# Altium PCB L50T-MAU.PcbDoc (part 2 of 2)
Units mil, origin at the board's own origin, x right, y up, seen from the top; angles counter-clockwise.
Board outline 6702.94 x 9262 mil, 2 copper layers (Top Layer, Bottom Layer); 116 components, 86 nets, 377 pads, 320 vias.
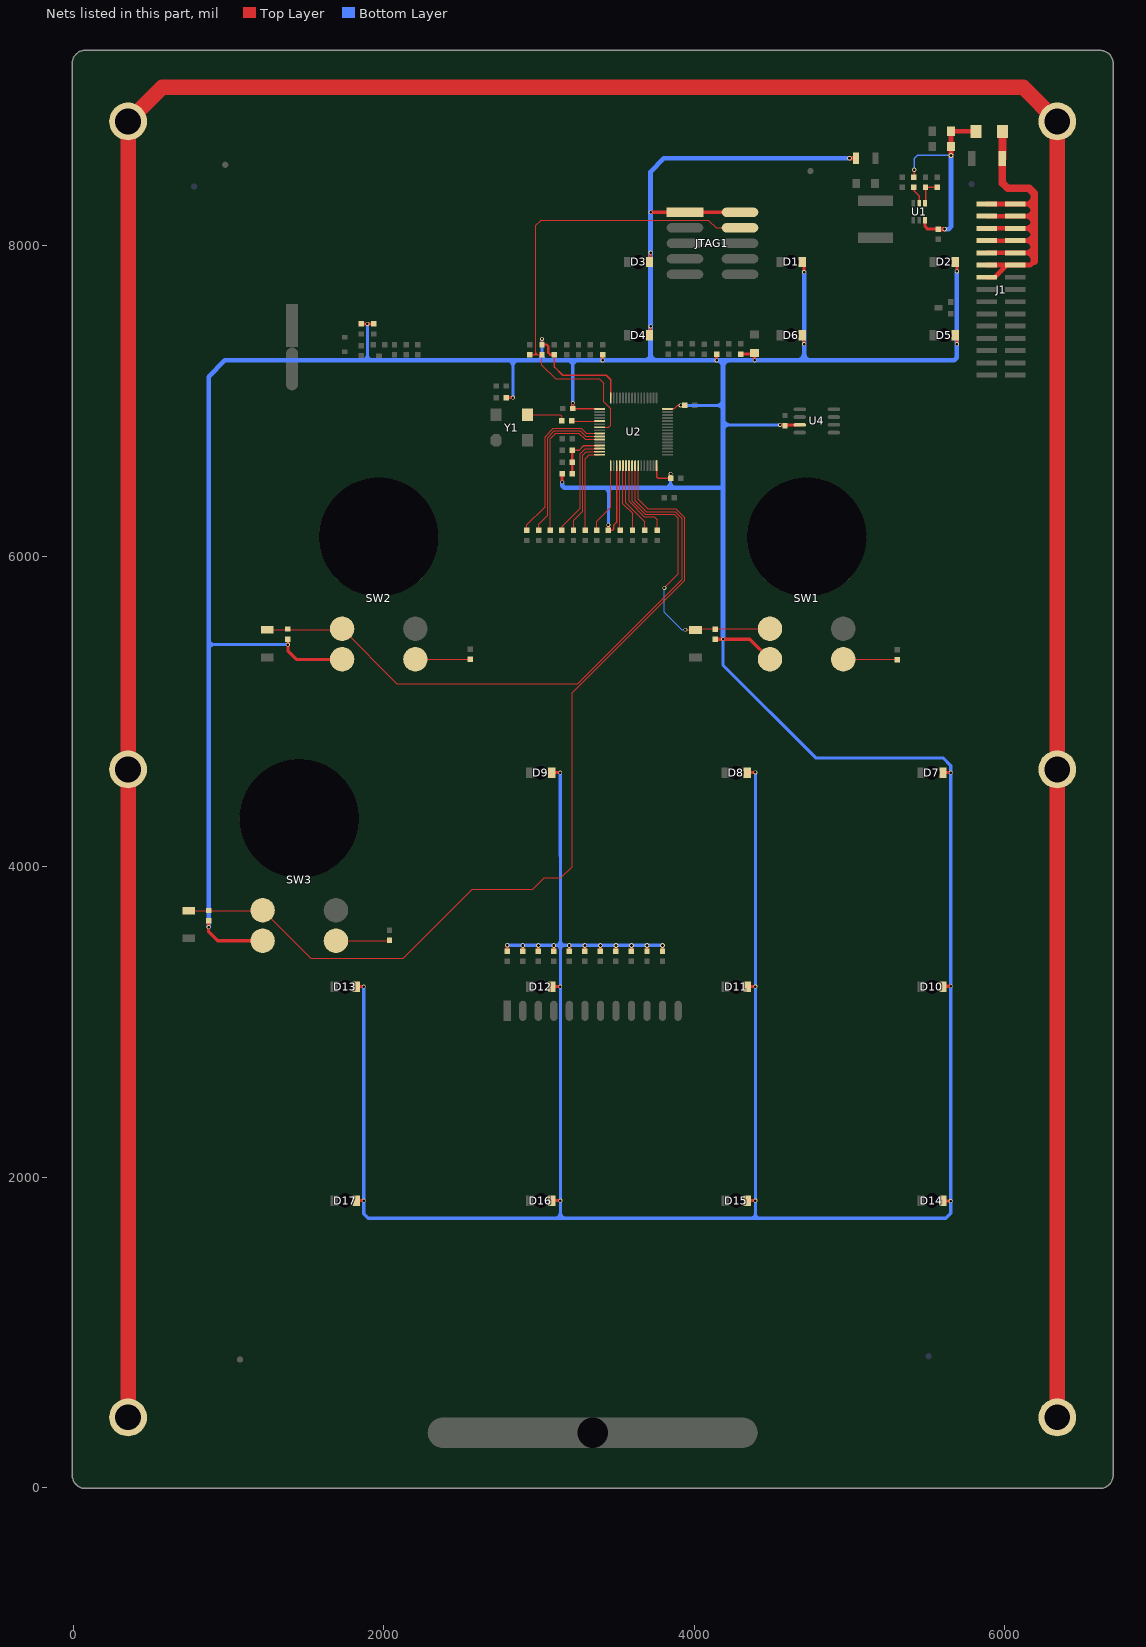
[diagram p2: the nets of this part, all layers, seen from the top]

## Via types
v1: diameter 25, hole 16, Top Layer to Bottom Layer, tented both sides, 293 vias
v2: diameter 30, hole 18, Top Layer to Bottom Layer, tented both sides, 24 vias
v3: diameter 40, hole 20, Top Layer to Bottom Layer, tented both sides, 2 vias
v4: diameter 28, hole 16, Top Layer to Bottom Layer, tented both sides, 1 vias

## Nets (pads, with @x,y where several pads share a name; then routed paths per layer and width w, separated by ;. In a path a pad name is that pad's centre, name@x,y a point inside that pad or via, vN(x,y) a via of type N, cw(c..) or ccw(c..) an arc to the next point about the centre after c; other vN are vias at no path point) (continued)
NetR4_1: R4.1 U1.5 | length 117
  Top Layer w10: R4.1@5415,8375 5415,8352.91 5449,8318.91 U1.5@5449,8272.12
NetR5_2: R5.2 R7.1 U1.4 | length 179.4
  Top Layer w10: U1.4@5486.4,8272.12 5490,8275.72 R5.2@5490,8375 R7.1@5565,8375
NetR20_2: R20.2 Y1.3 | length 257.2
  Top Layer w8: Y1.3@2925,6910.35 3137.56,6910.35 3147.91,6900 R20.2@3147.91,6870
NetR26_2: R26.2 SW1.4 | length 348.4
  Top Layer w8: SW1.4@4960.63,5334.65 5305.27,5334.65 R26.2@5307.91,5332
NetR27_2: R27.2 SW2.4 | length 354.7
  Top Layer w8: SW2.4@2204.72,5334.65 2557.56,5334.65 R27.2@2558.91,5336
NetR28_2: R28.2 SW3.4 | length 346.2
  Top Layer w8: SW3.4@1692.91,3522.05 2034.96,3522.05 R28.2@2037.91,3525
NRST: CU2.2 JTAG1.4 R16.1 U2.7 | length 3191.7
  Top Layer w8: CU2.2@2939.91,7297 2964.01,7297 ; 2996,7297 cw(c2995.96,7313.04) 2995.9,7297 ; U2.7@3391.5,6829.53 3450.53,6829.53 3462,6841 3462,6950 3418,6994 3418,7112 3389,7141 3109,7141 3019.91,7230.09 R16.1@3019.91,7297 2995.9,7297 ; JTAG1.4@4295.17,8114 4142,8114 4092,8164 3014,8164 2979.91,8129.91 2979.91,7312.99 2979.91,7312.9 ; 2964.01,7297 ccw(c2963.96,7312.96) 2979.91,7312.9 ; 2964.01,7297 2979.91,7297 ; 2979.91,7297 2979.91,7312.9 ; 2979.91,7297 2995.9,7297 ; 2979.91,7312.9 ccw(c2995.96,7313.04) 2995.9,7297 ; 2979.91,7312.9 cw(c2995.96,7313.04) 2979.91,7312.96 cw(c2963.96,7312.96) 2979.91,7312.9
OSC_IN: R20.1 U2.5 | length 179
  Top Layer w8: R20.1@3214.02,6868.9 U2.5@3391.5,6868.9
  Top Layer w10: R20.1@3212.91,6870 R20.1@3214.02,6868.9
PG: I1.1 I2.1 I3.1 I4.1 I5.1 I6.1 | length 22860.1
  Top Layer w100: I5.1@354.33,452.76 I3.1@354.33,4625.98 I1.1@354.33,8799.21 575.12,9020 6117.8,9020 I2.1@6338.58,8799.21 I4.1@6338.58,4625.98 I6.1@6338.58,452.76
SIGNAL1: R23.1 SW3.1 U2.26 Z3.1 | length 5954.5
  Top Layer w8: Z3.1@744.91,3716 1217.57,3716 SW3.1@1220.47,3718.9 1530.37,3409 2124.91,3409 2570.91,3855 2959.91,3855 3032.91,3928 3141.49,3928 3213.49,4000 3213.49,5118.2 3938.91,5843.63 3938.91,6246.37 3879.97,6305.32 3699.76,6305.32 3639.53,6365.55 U2.26@3639.53,6581.5
SIGNAL2: R22.1 SW2.1 U2.25 Z2.1 | length 4066
  Top Layer w8: Z2.1@1249.91,5525 1725.79,5525 SW2.1@1732.28,5531.5 2085.78,5178 3250.66,5178 3922.91,5850.25 3922.91,6239.75 3877.03,6285.63 3691.61,6285.63 3619.84,6357.39 U2.25@3619.84,6581.5
SIGNAL3: R21.1 SW1.1 U2.24 Z1.1 | length 1943.5
  Top Layer w8: U2.24@3600.16,6581.5 3601.94,6579.72 3601.94,6352.67 3684.98,6269.63 3870.4,6269.63 3897.91,6242.12 3897.91,5885 v1(3807.91,5795) ; v1(3942.91,5525) 4006.91,5525 Z1.1@4007.91,5524 4015.41,5531.5 SW1.1@4488.19,5531.5
  Bottom Layer w8: v1(3807.91,5795) 3807.91,5637.63 3920.54,5525 v1(3942.91,5525)
SPS12V: C1.2 C2.2 C3.1 D19.2 R4.2 U1.3 | length 1361.5
  Top Layer w10: R4.2@5415,8440 5416.91,8441.91 v2(5416.91,8488)
  Top Layer w20: U1.3@5486.4,8161.88 5486.4,8123.51 5504.41,8105.5 C3.1@5573,8105.5
  Top Layer w30: C3.1@5573,8105.5 v2(5612.91,8105.5) ; v2(5654,8580) C2.2@5654,8637 C1.2@5654,8735 D19.2@5815,8735
  Bottom Layer w10: v2(5416.91,8488) 5416.91,8561 5435.91,8580 v2(5654,8580)
  Bottom Layer w30: v2(5612.91,8105.5) 5638.41,8105.5 5654,8121.09 v2(5654,8580)
SPS_12V: D19.1 D20.2 J1.1 J1.2 J1.3 J1.4 J1.5 J1.6 J1.7 J1.8 J1.9 J1.10 J1.11 J1.12 J1.13 | length 3978.1
  Top Layer w30: J1.13@5884,7795.26 5935.26,7795.26 J1.12@6014,7874 ; J1.11@5884,7874 J1.12@6014,7874 ; J1.9@5884,7952.74 J1.10@6069,7952.74 6141,7952.74 ; J1.7@5884,8031.48 J1.8@6069,8031.48 6141,8031.48 ; J1.5@5884,8110.22 J1.6@6069,8110.22 6141,8110.22 ; J1.3@5884,8188.96 J1.4@6069,8188.96 6141,8188.96 ; J1.1@5884,8267.7 J1.2@6069,8267.7 6186.7,8267.7 ; D20.2@5984.85,8560 5984.85,8734.85 D19.1@5985,8735 ; 6140,8267.7 ccw(c6132.35,8317.35) 6182,8325 ; 6141,8189 ccw(c6137,8234) 6181.83,8228.45 ; 6142,8267.7 cw(c6131.15,8216.85) 6181.83,8228.45 ; 6182,7971 ccw(c6131.26,7980.74) 6182.04,7990.29 ; 6182,8050 ccw(c6131.39,8059.61) 6182.02,8069.12 ; 6182,8126 ccw(c6130.02,8136.98) 6181.65,8149.5 ; 6182,8170 cw(c6131.61,8160.61) 6181.65,8149.5 ; 6182,8206 ccw(c6131.15,8216.85) 6181.83,8228.45 ; 6182,8238 cw(c6137,8234) 6181.83,8228.45 ; 6183,8012 cw(c6132.37,8003.37) 6182.04,7990.29 ; 6183,8092 cw(c6131.74,8082.74) 6182.02,8069.12 ; 6183.48,8031.48 6141,8031.48 ; 6186.22,8110.22 6141,8110.22 ; 6190,7899 6183,7892 ; 6190,7954 6188.74,7952.74 6141,7952.74 ; 6190,8198 6180.96,8188.96 6141,8188.96 ; J1.12@6014,7874 J1.12@6069,7874 6165,7874 6183,7892 ; 6141,7952.74 ccw(c6132.37,8003.37) 6182.04,7990.29 ; 6141,7952.74 cw(c6131.63,7901.37) 6183,7892 ; 6141,8031.48 cw(c6131.26,7980.74) 6182.04,7990.29 ; 6141,8031.48 ccw(c6131.74,8082.74) 6182.02,8069.12 ; 6141,8110.22 cw(c6131.39,8059.61) 6182.02,8069.12 ; 6141,8110.22 ccw(c6131.61,8160.61) 6181.65,8149.5 ; 6141,8188.96 cw(c6130.02,8136.98) 6181.65,8149.5
  Top Layer w50: D19.1@5985,8735 5985,8560.15 D20.2@5984.85,8560 5984.85,8403.15 6019,8369 6156,8369 6190,8335 6190,8198 6190,7954 6190,7899
STEP0: R24.1 U2.23 | length 530.7
  Top Layer w8: U2.23@3580.47,6581.5 3580.47,6351.51 3678.35,6253.63 3744.28,6253.63 3762.91,6235 R24.1@3762.91,6165
STEP1: R25.1 U2.20 | length 420
  Top Layer w8: R25.1@3512.91,6165 3521.42,6173.5 U2.20@3521.42,6581.5
STEP2: R29.1 U2.15 | length 627.6
  Top Layer w8: R29.1@3222.91,6165 3222.91,6230 3281.91,6289 3281.91,6649 3304.96,6672.05 U2.15@3391.5,6672.05
STEP4: R30.1 U2.22 | length 467.1
  Top Layer w8: U2.22@3560.79,6581.5 3560.79,6342.13 3682.91,6220 R30.1@3682.91,6165
STEP5: R31.1 U2.17 | length 453.5
  Top Layer w8: R31.1@3372.91,6165 3372.91,6225 3462.36,6314.45 U2.17@3462.36,6581.5
STEP6: R32.1 U2.14 | length 681.4
  Top Layer w8: R32.1@3147.91,6165 3147.91,6190 3265.91,6308 3265.91,6658 3299.65,6691.73 U2.14@3391.5,6691.73
STEP7: R33.1 U2.10 | length 989.6
  Top Layer w8: R33.1@2997.91,6165 2997.91,6205 3055.91,6263 3055.91,6762.04 3099.87,6806 3265.96,6806 3301.48,6770.47 U2.10@3391.5,6770.47
STEP8: R34.1 U2.21 | length 442.1
  Top Layer w8: U2.21@3541.1,6581.5 3541.1,6336.81 3602.91,6275 R34.1@3602.91,6165
STEP9: R35.1 U2.16 | length 564.9
  Top Layer w8: R35.1@3297.91,6165 3297.91,6625 3325.28,6652.36 U2.16@3391.5,6652.36
STEP10: R36.1 U2.11 | length 939.3
  Top Layer w8: R36.1@3072.91,6165 3072.91,6755 3107.91,6790 3257.91,6790 3297.13,6750.79 U2.11@3391.5,6750.79
STEP11: R38.1 U2.9 | length 1039
  Top Layer w8: R38.1@2922.91,6165 2922.91,6200 3039.91,6317 3039.91,6768.67 3093.24,6822 3272.58,6822 3304.42,6790.16 U2.9@3391.5,6790.16
V3.3: C6.1 C10.2 C12.1 CU1.2 CU4.2 CU5.2 CU6.2 CU7.2 D1.1 D2.1 D3.1 D4.1 D5.1 D6.1 D7.1 D8.1 D9.1 D10.1 D11.1 D12.1 D13.1 D14.1 D15.1 D16.1 D17.1 F1.2 FB1.2 FB2.1 JTAG1.1 JTAG1.2 R12.2 R13.2 R14.2 R15.2 R16.2 R21.2 R22.2 R23.2 R40.1 R41.1 R42.1 R43.1 R44.1 R45.1 R46.1 R47.1 R48.1 R49.1 R50.1 SW1.3 SW2.3 SW3.3 U2.1 U2.19 U2.32 U2.48 U2.64 U4.3 | length 41607.7
  Top Layer w10: CU7.2@3099.91,7297 3099.91,7217.09 3153,7164 3433,7164 3462.36,7134.64 U2.64@3462.36,7018.5 ; CU4.2@3217.91,6950 3220.28,6947.64 U2.1@3391.5,6947.64 ; CU5.2@3447.91,6165 3472.91,6165 3482.91,6175 3482.91,6200 3501.73,6218.82 U2.19@3501.73,6581.5 ; U2.32@3757.64,6581.5 3757.64,6510.28 3767.91,6500 CU6.2@3847.91,6500 ; U2.48@3828.5,6947.64 3870.55,6947.64 3892.91,6970 v1(3912.91,6970) CU1.2@3937.91,6970
  Top Layer w15: v1(3019.91,7398) R16.2@3019.91,7362 3049,7362 3060,7351 3060,7310 3073,7297 CU7.2@3099.91,7297
  Top Layer w20: R23.2@872.91,3652 v1(872.91,3610) 872.91,3580 930.87,3522.05 SW3.3@1220.47,3522.05 ; R22.2@1382.91,5465 v1(1382.91,5430) 1382.91,5390 1438.27,5334.65 SW2.3@1732.28,5334.65 ; D17.1@1822.83,1848.82 v1(1871.82,1848.82) ; D13.1@1822.83,3226.77 v1@1871.77,3226.77 ; R12.2@1855,7495 v1(1895.91,7495) C6.1@1935,7495 ; FB1.2@2790,7020 v1(2832.91,7020) ; R40.1@2796.46,3456 v2(2796.46,3493) ; R41.1@2896.48,3455 v2(2896.48,3492) ; R42.1@2996.5,3455 v2(2996.5,3492) ; D16.1@3082.68,1848.82 v1(3138,1848.82) ; D12.1@3082.68,3226.77 v1(3137.77,3226.77) ; D9.1@3082.68,4604.72 v1(3137.72,4604.72) ; R43.1@3095.99,3455 v2(3095.99,3492) ; v1(3150,6475) FB2.1@3150,6530 ; R44.1@3196.02,3455 v2(3196.02,3492) ; CU4.2@3217.91,6950 v1(3217.91,6985) ; R45.1@3296.04,3455 v2(3296.04,3492) ; R46.1@3396.06,3455 v2(3396.06,3492) ; v1@3409.91,7260.09 R15.2@3409.91,7297 ; CU5.2@3447.91,6165 v1(3447.91,6200) ; R47.1@3496.08,3455 v2(3496.08,3492) ; R48.1@3596.1,3455 v2(3596.1,3492) ; R49.1@3696.12,3455 v2(3696.12,3492) ; D4.1@3712.6,7421.26 3719,7427.66 v1(3719,7479) ; D3.1@3712.6,7893.7 3719,7900.1 v1(3719,7954) ; v1(3719,8214) JTAG1.1@3940.83,8214 JTAG1.2@4295.17,8214 ; R50.1@3796.15,3455 v2(3796.15,3492) ; CU6.2@3847.91,6500 v1(3847.91,6530) ; R21.2@4136.91,5464 v1(4185.91,5464) 4358.83,5464 SW1.3@4488.19,5334.65 ; v1(4144.91,7260.09) R14.2@4144.91,7300.91 ; R13.2@4300.91,7300.91 4382.91,7300.91 C10.2@4389,7307 4389,7261 v1(4390,7260) ; D15.1@4342.52,1848.82 v1(4393.82,1848.82) ; D11.1@4342.52,3226.77 v1(4393.77,3226.77) ; D8.1@4342.52,4604.72 v1@4393.72,4604.72 ; v1(4552.91,6845) U4.3@4680,6845 ; D6.1@4696.85,7421.26 4708,7410.11 v1(4708,7365) ; D1.1@4696.85,7893.7 4708,7882.55 v1(4708,7829) ; v2@4997.91,8560 v2(4999.91,8562) ; D14.1@5602.36,1848.82 5606.18,1845 v1(5652,1845) ; D10.1@5602.36,3226.77 5604.59,3229 v1(5652.72,3229) ; D7.1@5602.36,4604.72 v1(5652.72,4604.72) ; D5.1@5681.1,7421.26 5692,7410.36 v1(5692,7365) ; D2.1@5681.1,7893.7 5692,7882.8 v1(5692,7833)
  Top Layer w30: v2(4999.91,8562) F1.2@5043.01,8562
  Bottom Layer w15: 3019.91,7263.09 3023,7260
  Bottom Layer w20: 872.91,5395 cw(c910.41,5392.5) 907.91,5430 ; 872.91,5430 907.91,5430 ; 872.91,5470 ccw(c910.41,5467.5) 872.91,5465 ccw(c910.41,5467.5) 907.91,5430 ; 912.91,5430 ccw(c910.41,5392.5) 907.91,5430 ; v1(1382.91,5430) 907.91,5430 ; 1857.91,7260 ccw(c1856.91,7299) 1895.91,7298 ; v1(1872,3227) 1872,1764 1901,1735 3102.01,1735 ; 1895.91,7263 1895.91,7297 ; v1(1895.91,7495) 1895.91,7300 ; 1925.91,7260 ccw(c1929.41,7293.5) 1932.91,7260 cw(c1933.42,7297.5) 1895.91,7297 ; 2792.91,7260 cw(c2792.91,7220) 2832.91,7220 ; v2(2796.46,3493) 3138,3493 ; v1(2832.91,7020) 2832.91,7220 ; 2832.91,7260 2832.91,7220 ; 2872.91,7260 ccw(c2872.91,7220) 2832.91,7220 ; 2977,7260 ccw(c2976.46,7303.46) 3019.91,7302.91 ; 3019.91,7263.09 3019.91,7302.91 ; 3019.91,7304 cw(c2976.46,7303.46) 3019.91,7302.91 ; v1(3019.91,7398) 3019.91,7302.91 ; 3020,7304 ccw(c3063.5,7303.5) 3063,7260 ; 3101,1735 ccw(c3101.5,1771.5) 3102.01,1735 ; v1(3137.72,4604.72) 3137.99,3520.9 ; 3177.91,7260 cw(c3177.91,7220) 3217.91,7220 ; 3212.91,7260 3217.91,7255 3217.91,7220 ; v1(3217.91,6985) 3217.91,7220 ; 3257.91,7260 ccw(c3257.91,7220) 3217.91,7220 ; 3397.91,6440 cw(c3405.41,6397.5) 3412.91,6440 ; 3417.91,6435 cw(c3417.91,6405) 3447.91,6405 cw(c3485.41,6402.5) 3482.91,6440 ; v1(3447.91,6200) 3447.91,6435 ; v2(3796.15,3492) 3795.15,3493 3170,3493 ; 3802.91,6445 3807.91,6440 ccw(c3807.91,6480) 3847.83,6477.42 ; v1(3847.91,6530) 3847.91,6475 ; 3852.91,6440 3847.91,6445 3847.91,6475 ; 3882.91,6440 cw(c3885.41,6477.5) 3847.91,6475 ; v1(3912.91,6970) 4142.91,6970 ; v1(4185.91,5464) 4185.91,5297 4782.91,4700 5603,4700 5652.72,4650.28 v1(5652.72,4604.72) v1(5652.72,3229) 5652.72,1766.72 5621,1735 4425,1735 ; 4185.91,6805 cw(c4229.41,6801.5) 4225.91,6845 ; 4185.91,6845 4225.91,6845 ; 4185.91,6900 ccw(c4234.41,6893.5) 4185.91,6887 ccw(c4234.41,6893.5) 4227.28,6845.09 ; 4185.91,6930 ccw(c4144.41,6928.5) 4145.91,6970 ; 4185.91,6970 4145.91,6970 ; 4185.91,7010 cw(c4144.41,7011.5) 4145.91,6970 ; 4227.91,6845 cw(c4234.41,6893.5) 4227.28,6845.09 ; 4232.91,6845 ccw(c4229.41,6801.5) 4227.28,6845.09 ; 4364,1735 ccw(c4363,1766) 4394,1765 ; v1(4394,4606) 4394,1767 ; v1(4552.91,6845) 4225.91,6845 ; 1895.91,7297 cw(c1933.42,7297.5) 1895.91,7298 ; 1895.91,7297 1895.91,7298 ; 1895.91,7298 ccw(c1856.91,7299) 1895.91,7300 ; 1895.91,7298 1895.91,7300 ; 3102.01,1735 ccw(c3101.5,1771.5) 3138,1771 ; 3102.01,1735 3141,1735 ; 3138,1771 ccw(c3178,1775) 3174,1735 ; 3138,1771 3138,1738 3141,1735 ; 3138,1771 v1(3138,1848.82) 3138,3493 ; 3138,3493 3166,3493 ; 3138,3493 3137.99,3520.9 ; 3137.99,3520.9 ccw(c3108,3523) 3138.07,3522.94 ; 3137.99,3520.9 cw(c3108,3523) 3110,3493 cw(c3110,3465) 3138,3465 cw(c3168,3463) 3166,3493 ; 3138.07,3522.94 ccw(c3170,3525) 3167.94,3493.07 ; 3138.07,3522.94 cw(c3170,3525) 3138,3525 cw(c3108,3523) 3138.07,3522.94 ; 3141,1735 3174,1735 ; 3166,3493 cw(c3168,3463) 3167.94,3493.07 ; 3166,3493 3170,3493 ; 3167.94,3493.07 ccw(c3170,3525) 3170,3493 ; 3167.94,3493.07 cw(c3168,3463) 3170,3493 ; 3174,1735 ccw(c3178,1775) 3182,1735 ; 3174,1735 3182,1735 ; 3182,1735 4394,1735 ; 3847.83,6477.42 cw(c3885.41,6477.5) 3847.91,6480 cw(c3807.91,6480) 3847.83,6477.42 ; 3847.83,6477.42 ccw(c3885.41,6477.5) 3847.91,6475 ; 4142.91,6970 cw(c4144.41,6928.5) 4145.91,6970 ; 4142.91,6970 ccw(c4144.41,7011.5) 4145.91,6970 ; 4142.91,6970 4145.91,6970 ; 4225.91,6845 cw(c4229.41,6801.5) 4227.28,6845.09 ; 4394,1735 4425,1735 ; 4394,1735 4394,1765 ; 4394,1765 ccw(c4363,1766) 4394.01,1765.49 ; 4394,1765 4394,1766 ; 4394.01,1765.49 ccw(c4425.5,1766.5) 4425,1735 ; 4394.01,1765.49 ccw(c4363,1766) 4394,1767 ; 4394.01,1765.49 cw(c4425.5,1766.5) 4394,1766 ; 4394,1766 cw(c4425.5,1766.5) 4394,1767 ; 4394,1766 4394,1767
  Bottom Layer w30: v1(872.91,3610) 872.91,5430 872.91,5465 872.91,5470 872.91,7155 977.91,7260 1925.91,7260 1932.91,7260 2792.91,7260 2832.91,7260 2872.91,7260 2977,7260 3023,7260 3063,7260 3177.91,7260 3212.91,7260 3257.91,7260 v1(3410,7260) 3625.91,7260 ; v1(3150,6475) 3150,6452.91 3162.91,6440 3397.91,6440 3482.91,6440 3807.91,6440 3852.91,6440 4185.91,6440 ; 3630.91,7260 3625.91,7260 ; 3682,7260 ccw(c3680.5,7298.5) 3719,7297 ; 3759,7260 cw(c3759,7300) 3719.03,7298.47 ; v1@4142.91,7260 cw(c4145.91,7220) v1@4148.91,7260 ; v1(4185.91,5464) 4185.91,6440 ; v1(4708,7829) v1(4708,7365) 4708,7301 ; 4755,7260 cw(c4752,7304) 4749,7260 ; v2(4999.91,8562) 3805,8562 3719,8476 v1(3719,8214) v1(3719,7954) v1(3719,7479) 3719,7300 ; v1(5692,7833) v1(5692,7365) 5692,7277 5675,7260 4749,7260 ; 3625.91,7260 3719.23,7260 ; 3719,7297 ccw(c3680.5,7298.5) 3719.03,7298.47 ; 3719,7297 3719,7260.23 3719.23,7260 ; 3719,7297 3719,7300 ; 3719,7300 cw(c3680.5,7298.5) 3719.03,7298.47 ; 3719,7300 ccw(c3759,7300) 3719.03,7298.47 ; 3719.23,7260 4025.91,7260 v1@4148.91,7260 ; v1@4148.91,7260 cw(c4145.91,7220) 4185.91,7223 ; v1@4148.91,7260 4185.91,7260 ; 4185.91,6440 4185.91,6805 4185.91,6845 4185.91,6887 4185.91,6900 4185.91,6930 4185.91,6970 4185.91,7010 4185.91,7223 ; 4185.91,7223 cw(c4226.91,7219) 4222.91,7260 ; 4185.91,7223 4185.91,7260 ; 4185.91,7260 4222.91,7260 ; 4222.91,7260 v1(4390,7260) 4662,7260 ; 4662,7260 ccw(c4664.5,7303.5) 4667,7260 ; 4662,7260 4667,7260 ; 4667,7260 ccw(c4664.5,7303.5) 4708,7301 ; 4667,7260 4708,7260 ; 4708,7260 4749,7260 ; 4708,7260 4708,7301 ; 4708,7301 ccw(c4752,7304) 4749,7260
V3.3A: CU3.1 CU8.1 FB2.2 U2.13 | length 339.5
  Top Layer w10: CU8.1@3215,6680 3257.91,6680 3289.33,6711.42 U2.13@3391.5,6711.42
  Top Layer w15: FB2.2@3215,6530 CU3.1@3215,6605 CU8.1@3215,6680
pads on no net: D1.0 D2.0 D3.0 D4.0 D5.0 D6.0 D7.0 D8.0 D9.0 D10.0 D11.0 D12.0 D13.0 D14.0 D15.0 D16.0 D17.0 SW1.0 SW2.0 SW3.0 U2.2 U2.6 U2.42 U2.43 U2.57 U2.59 U2.61 U2.62 U4.5 U4.8 Y1.1

## Polygon pours and split planes (outlines as drawn)
DGND on Top Layer "Top Layer-No Net 1" (hatched 90Degree grid 8 track 8, remove dead copper, pour order 32): 3902,2743 6103,2743 6103,2845 6103,8795 6019,8795 589,8795 589,8586 589,2743 3902,2743
DGND on Bottom Layer "Top Layer-No Net 1" (hatched 90Degree grid 8 track 8, remove dead copper, pour order 34): 6102,2743 6102,8793 6102,8794 6102,8795 589,8795 589,2743 6102,2743

## Keep-outs
Keep-Out Layer:
  circle w10: c1456.69,4309.45 r496.06
  circle w10: c4724.41,6122.05 r496.06
  circle w10: c1968.5,6122.05 r496.06
  lines w10: 0,78.74 ccw(c78.74,78.74) 78.74,0 ; 0,79.74 0,9173.23 cw(c78.74,9173.23) 78.74,9251.97 6614.17,9251.97 cw(c6614.17,9173.23) 6692.91,9173.23 6692.91,78.74 cw(c6614.17,78.74) 6614.17,0

## Other copper
Top Layer:
  pour cut-out: 5038.07,8600 5189.93,8600 5191.63,8598.3 5191.63,8525.7 5038.78,8525.7 5038.07,8525
  pour cut-out: 2669.57,6969.72 2980.43,6969.72 2980.43,6686.8 2978.63,6685 2670,6685 2670,6969.29

## Silkscreen, mask and mechanical layers (free items; w line width, h text height)
Top Overlay:
  text "1.5A" at 5050,8685 h40
  text "RED" at 3158.31,4587 h35
  text "YELLOW" at 4418.16,4587 h35
  text "FN" at 5678,4587 h35
  text "4" at 1898.47,3209.05 h35
  text "3" at 3158.31,3209.05 h35
  text "2" at 4418.16,3209.05 h35
  text "1" at 5678,3209.05 h35
  text "KEY1" at 2827.91,2550 h40 r90
  text "KEY2" at 2927.91,2550 h40 r90
  text "KEY3" at 3032.91,2550 h40 r90
  text "KEY4" at 3132.91,2550 h40 r90
  text "KEY5" at 3227.91,2550 h40 r90
  text "KEY6" at 3337.91,2550 h40 r90
  text "KEY7" at 3432.91,2550 h40 r90
  text "KEY8" at 3537.91,2550 h40 r90
  text "KEY9" at 3627.91,2550 h40 r90
  text "KEY10" at 3727.91,2550 h40 r90
  text "KEY11" at 3832.91,2550 h40 r90
  text "GND" at 3927.91,2550 h40 r90
  text "L50T-MAUe" at 3399,2250 h100
  text "GLL7.820.2573 SV2.0" at 3407,2057 h50
  text "8" at 1898.47,1831.09 h35
  text "7" at 3158.31,1831.09 h35
  text "6" at 4418.16,1831.09 h35
  text "5" at 5678,1831.09 h35
  text "SN:" at 2600,1340.47 h250
Bottom Overlay:
  lines w10: 590.55,590.55 590.55,8661.42 6102.36,8661.42 6102.36,688.98 6102.36,590.55 590.55,590.55
  text "贴膜面" at 1710,8190 h300
  text "故障" at 3745.91,7681 h100
  text "运行" at 4713.91,7681 h100
  text "电源" at 5702.91,7681 h100
  text "自动" at 3745.91,7208 h100
  text "中心" at 4713.91,7208 h100
  text "等待" at 5702.91,7208 h100
  text "外灯" at 4820.91,5540.65 h100
  text "手控" at 2070.91,5540 h100
  text "步进" at 1558.91,3736 h100
Mechanical 1:
  circle w0.5: c-44325.84,-30355.1 r0.75
  circle w0.5: c-44325.84,-30343.1 r0.75
  circle w0.5: c-44350.84,-30355.1 r0.75
  circle w0.5: c-44350.84,-30343.1 r0.75
  circle w0.5: c-44375.84,-30355.1 r0.75
  circle w0.5: c-44270.35,-30434.14 r9.5
  circle w0.5: c-44277.84,-30496.64 r0.75
  circle w0.5: c-44277.85,-30461.64 r0.75
  circle w0.5: c-44309.84,-30496.64 r0.75
  circle w0.5: c-44309.85,-30461.64 r0.75
  circle w0.5: c-44341.84,-30496.64 r0.75
  circle w0.5: c-44341.85,-30461.64 r0.75
  circle w0.5: c-44373.84,-30496.64 r0.75
  circle w0.5: c-44373.85,-30461.64 r0.75
  circle w0.5: c-44309.85,-30426.64 r0.75
  circle w0.5: c-44341.85,-30426.64 r0.75
  circle w0.5: c-44373.85,-30426.64 r0.75
  circle w0.5: c-44283.35,-30388.1 r9.5
  circle w0.5: c-44353.35,-30388.1 r9.5
  circle w0.5: c-44375.84,-30343.1 r0.75
  circle w0.5: c-44394.35,-30426.1 r1.6
  circle w0.5: c-44394.35,-30532.1 r1.6
  circle w0.5: c-44242.35,-30532.1 r1.6
  circle w0.5: c-44242.35,-30426.1 r1.6
  circle w0.5: c-44242.35,-30320.1 r1.6
  circle w0.5: c-44394.35,-30320.1 r1.6
  lines w0.5: -44403.35,-30543.6 -44233.35,-30543.6 -44233.35,-30308.6 -44403.35,-30308.6 -44403.35,-30543.6 ; -44403.35,-30541.6 -44403.35,-30310.6 -44403.35,-30541.6 ; -44376.34,-30511.64 ccw(c-44373.84,-30511.64) -44373.84,-30514.14 -44358.84,-30514.14 ccw(c-44358.84,-30511.64) -44356.34,-30511.64 -44356.34,-30496.64 ccw(c-44358.84,-30496.64) -44358.84,-30494.14 -44373.84,-30494.14 ccw(c-44373.84,-30496.64) -44376.34,-30496.64 -44376.34,-30511.64 ; -44376.35,-30476.64 ccw(c-44373.85,-30476.64) -44373.85,-30479.14 -44358.85,-30479.14 ccw(c-44358.85,-30476.64) -44356.35,-30476.64 -44356.35,-30461.64 ccw(c-44358.85,-30461.64) -44358.85,-30459.14 -44373.85,-30459.14 ccw(c-44373.85,-30461.64) -44376.35,-30461.64 -44376.35,-30476.64 ; -44376.35,-30441.64 ccw(c-44373.85,-30441.64) -44373.85,-30444.14 -44358.85,-30444.14 ccw(c-44358.85,-30441.64) -44356.35,-30441.64 -44356.35,-30426.64 ccw(c-44358.85,-30426.64) -44358.85,-30424.14 -44373.85,-30424.14 ccw(c-44373.85,-30426.64) -44376.35,-30426.64 -44376.35,-30441.64 ; -44344.34,-30511.64 ccw(c-44341.84,-30511.64) -44341.84,-30514.14 -44326.84,-30514.14 ccw(c-44326.84,-30511.64) -44324.34,-30511.64 -44324.34,-30496.64 ccw(c-44326.84,-30496.64) -44326.84,-30494.14 -44341.84,-30494.14 ccw(c-44341.84,-30496.64) -44344.34,-30496.64 -44344.34,-30511.64 ; -44344.35,-30476.64 ccw(c-44341.85,-30476.64) -44341.85,-30479.14 -44326.85,-30479.14 ccw(c-44326.85,-30476.64) -44324.35,-30476.64 -44324.35,-30461.64 ccw(c-44326.85,-30461.64) -44326.85,-30459.14 -44341.85,-30459.14 ccw(c-44341.85,-30461.64) -44344.35,-30461.64 -44344.35,-30476.64 ; -44344.35,-30441.64 ccw(c-44341.85,-30441.64) -44341.85,-30444.14 -44326.85,-30444.14 ccw(c-44326.85,-30441.64) -44324.35,-30441.64 -44324.35,-30426.64 ccw(c-44326.85,-30426.64) -44326.85,-30424.14 -44341.85,-30424.14 ccw(c-44341.85,-30426.64) -44344.35,-30426.64 -44344.35,-30441.64 ; -44312.34,-30511.64 ccw(c-44309.84,-30511.64) -44309.84,-30514.14 -44294.84,-30514.14 ccw(c-44294.84,-30511.64) -44292.34,-30511.64 -44292.34,-30496.64 ccw(c-44294.84,-30496.64) -44294.84,-30494.14 -44309.84,-30494.14 ccw(c-44309.84,-30496.64) -44312.34,-30496.64 -44312.34,-30511.64 ; -44312.35,-30476.64 ccw(c-44309.85,-30476.64) -44309.85,-30479.14 -44294.85,-30479.14 ccw(c-44294.85,-30476.64) -44292.35,-30476.64 -44292.35,-30461.64 ccw(c-44294.85,-30461.64) -44294.85,-30459.14 -44309.85,-30459.14 ccw(c-44309.85,-30461.64) -44312.35,-30461.64 -44312.35,-30476.64 ; -44312.35,-30441.64 ccw(c-44309.85,-30441.64) -44309.85,-30444.14 -44294.85,-30444.14 ccw(c-44294.85,-30441.64) -44292.35,-30441.64 -44292.35,-30426.64 ccw(c-44294.85,-30426.64) -44294.85,-30424.14 -44309.85,-30424.14 ccw(c-44309.85,-30426.64) -44312.35,-30426.64 -44312.35,-30441.64 ; -44280.34,-30511.64 ccw(c-44277.84,-30511.64) -44277.84,-30514.14 -44262.84,-30514.14 ccw(c-44262.84,-30511.64) -44260.34,-30511.64 -44260.34,-30496.64 ccw(c-44262.84,-30496.64) -44262.84,-30494.14 -44277.84,-30494.14 ccw(c-44277.84,-30496.64) -44280.34,-30496.64 -44280.34,-30511.64 ; -44280.35,-30476.64 ccw(c-44277.85,-30476.64) -44277.85,-30479.14 -44262.85,-30479.14 ccw(c-44262.85,-30476.64) -44260.35,-30476.64 -44260.35,-30461.64 ccw(c-44262.85,-30461.64) -44262.85,-30459.14 -44277.85,-30459.14 ccw(c-44277.85,-30461.64) -44280.35,-30461.64 -44280.35,-30476.64
  lines w10: 0,78.74 0,9173.23 cw(c78.74,9173.23) 78.74,9251.97 6614.17,9251.97 cw(c6614.17,9173.23) 6692.91,9173.23 6692.91,78.74 cw(c6614.17,78.74) 6614.17,0 78.74,0
  lines w196.85: 2381.89,354.33 4311.02,354.33
Mechanical 14:
  text "印制板制作说明：" at 934.49,-745 h157.48
  text "1，请使用Altium Designer10以上版本打开图纸电子版；" at 934.49,-928.29 h157.48
  text "2，该印制板为双层板，板厚2mm；" at 934.49,-1112.81 h157.48
  text "3，切割以Mechanical 1层为准；" at 934.49,-1296.1 h157.48
  text "4，要求丝印清晰，且不要额外添加任何其它丝印标识;" at 920.48,-1468.6 h157.48
  text "5，全部过孔用阻焊层覆盖，阻焊层着色为蓝色；" at 925.48,-1648.6 h157.48
  text "6，铜箔厚度1oz。" at 925.48,-1829.6 h157.48
  text "7，注意板上有5处开槽。" at 930,-2000 h157.48
Mechanical 15:
  text "开腰孔" at 3225,155 h100
Mechanical 17:
  circle w0.25: c-44326.57,-30343.28 r0.12
  circle w0.25: c-44325.12,-30342.91 r0.12
  circle w0.25: c-44374.41,-30427.13 r0.12
  circle w0.25: c-44373.28,-30426.14 r0.12
  circle w0.25: c-44270.07,-30494.14 r0.12
  circle w0.25: c-44275.8,-30494.14 r0.12
  circle w0.25: c-44277.84,-30496.64 r0.12
  circle w0.25: c-44280.34,-30504 r0.12
  circle w0.25: c-44280.34,-30497.14 r0.12
  circle w0.25: c-44277.84,-30496.64 r0.12
  circle w0.25: c-44213.23,-30543.6 r0.12
  circle w0.25: c-44233.35,-30543.6 r0.12
  circle w0.25: c-44270.35,-30434.14 r0.12
  circle w0.25: c-44403.35,-30362.61 r0.12
  circle w0.25: c-44403.35,-30388.1 r0.12
  circle w0.25: c-44353.35,-30388.1 r0.12
  circle w0.25: c-44222.03,-30434.13 r0.12
  circle w0.25: c-44270.35,-30434.13 r0.12
  circle w0.25: c-44283.35,-30388.1 r0.12
  circle w0.25: c-44260.34,-30521.15 r0.12
  circle w0.25: c-44260.34,-30505.86 r0.12
  circle w0.25: c-44280.34,-30505.86 r0.12
  circle w0.25: c-44253.01,-30494.14 r0.12
  circle w0.25: c-44267.24,-30494.14 r0.12
  circle w0.25: c-44267.24,-30514.14 r0.12
  circle w0.25: c-44270.35,-30421.81 r0.12
  circle w0.25: c-44270.35,-30434.14 r0.12
  circle w0.25: c-44309.85,-30426.64 r0.12
  circle w0.25: c-44389.89,-30426.64 r0.12
  circle w0.25: c-44373.85,-30426.64 r0.12
  circle w0.25: c-44373.85,-30461.64 r0.12
  circle w0.25: c-44381.24,-30461.64 r0.12
  circle w0.25: c-44373.85,-30461.64 r0.12
  circle w0.25: c-44373.84,-30496.64 r0.12
  circle w0.25: c-44380.91,-30496.64 r0.12
  circle w0.25: c-44373.84,-30496.64 r0.12
  circle w0.25: c-44373.39,-30543.6 r0.12
  circle w0.25: c-44277.84,-30488.4 r0.12
  circle w0.25: c-44277.84,-30496.64 r0.12
  circle w0.25: c-44309.84,-30496.64 r0.12
  circle w0.25: c-44309.84,-30488.16 r0.12
  circle w0.25: c-44309.84,-30496.64 r0.12
  circle w0.25: c-44341.84,-30496.64 r0.12
  circle w0.25: c-44341.84,-30488.12 r0.12
  circle w0.25: c-44341.84,-30496.64 r0.12
  circle w0.25: c-44373.84,-30496.64 r0.12
  circle w0.25: c-44403.35,-30488.01 r0.12
  circle w0.25: c-44403.35,-30496.64 r0.12
  circle w0.25: c-44373.84,-30496.64 r0.12
  circle w0.25: c-44283.35,-30362.75 r0.12
  circle w0.25: c-44283.35,-30388.1 r0.12
  circle w0.25: c-44353.35,-30388.1 r0.12
  circle w0.25: c-44325.84,-30332.38 r0.12
  circle w0.25: c-44325.84,-30343.1 r0.12
  circle w0.25: c-44350.84,-30343.1 r0.12
  circle w0.25: c-44350.84,-30332.21 r0.12
  circle w0.25: c-44350.84,-30343.1 r0.12
  circle w0.25: c-44375.84,-30343.1 r0.12
  circle w0.25: c-44379.91,-30308.6 r0.12
  circle w0.25: c-44375.84,-30308.6 r0.12
  circle w0.25: c-44375.84,-30343.1 r0.12
  circle w0.25: c-44403.35,-30339.01 r0.12
  circle w0.25: c-44403.35,-30343.1 r0.12
  circle w0.25: c-44375.84,-30343.1 r0.12
  circle w0.25: c-44382.2,-30355.1 r0.12
  circle w0.25: c-44375.84,-30355.1 r0.12
  circle w0.25: c-44375.84,-30343.1 r0.12
  circle w0.25: c-44392.77,-30320.4 r0.12
  circle w0.25: c-44395.92,-30319.79 r0.12
  circle w0.25: c-44403.35,-30302.17 r0.12
  circle w0.25: c-44403.35,-30308.6 r0.12
  circle w0.25: c-44394.35,-30320.1 r0.12
  circle w0.25: c-44242.35,-30302.15 r0.12
  circle w0.25: c-44242.35,-30320.1 r0.12
  circle w0.25: c-44394.35,-30320.1 r0.12
  circle w0.25: c-44411.35,-30543.6 r0.12
  circle w0.25: c-44403.35,-30543.6 r0.12
  circle w0.25: c-44394.35,-30532.1 r0.12
  circle w0.25: c-44427.25,-30320.1 r0.12
  circle w0.25: c-44394.35,-30320.1 r0.12
  circle w0.25: c-44394.35,-30532.1 r0.12
  circle w0.25: c-44411.35,-30426.1 r0.12
  circle w0.25: c-44394.35,-30426.1 r0.12
  circle w0.25: c-44394.35,-30532.1 r0.12
  circle w0.25: c-44233.35,-30291.54 r0.12
  circle w0.25: c-44233.35,-30330.11 r0.12
  circle w0.25: c-44403.35,-30330.11 r0.12
  circle w0.25: c-44199.84,-30308.6 r0.12
  circle w0.25: c-44248.35,-30308.6 r0.12
  circle w0.25: c-44233.25,-30543.6 r0.12
  circle w0.25: c-44218.79,-30543.6 r0.12
  circle w0.25: c-44233.35,-30543.6 r0.12
  circle w0.25: c-44263.35,-30514.14 r0.12
Mechanical 18:
  drawing of 169 lines, arcs and shapes, not listed
  text "170" at -44318.35,-30290.91 h3
  text "9" at -44398.85,-30301.54 h3
  text "152" at -44318.35,-30301.52 h3
  text "6-3.2通孔" at -44431.7,-30311.87 h3 r349.18
  text "34,5" at -44382.29,-30327.35 h3 r90
  text "25" at -44363.34,-30331.58 h3
  text "25" at -44338.34,-30331.76 h3
  text "27,5" at -44389.59,-30338.13 h3
  text "∅1,5" at -44309.49,-30338.06 h3 r14.03
  text "12" at -44384.33,-30350.6 h3 r90
  text "50" at -44378.35,-30361.99 h3
  text "70" at -44319.19,-30362.12 h3
  text "46,04" at -44224.41,-30412.62 h3 r90
  text "∅1,5" at -44367.45,-30419.33 h3 r41.42
  text "39,5" at -44290.1,-30420.94 h3
  text "212" at -44429.37,-30427.6 h3 r90
  text "235" at -44201.97,-30427.6 h3 r90
  text "35" at -44392.02,-30446.67 h3 r90
  text "106" at -44413.47,-30480.6 h3 r90
  text "35" at -44383.37,-30480.64 h3 r90
  text "29,5" at -44388.59,-30487.14 h3
  text "32" at -44357.84,-30487.5 h3
  text "2,5" at -44272.44,-30486.76 h3 r90
  text "32" at -44325.84,-30487.53 h3
  text "32" at -44293.84,-30487.77 h3
  text "109,46" at -44215.6,-30490.37 h3 r90
  text "2,5" at -44289.22,-30503.13 h3
  text "20" at -44255.13,-30505.64 h3 r90
  text "46,96" at -44383.28,-30520.68 h3 r90
  text "20" at -44270.34,-30520.53 h3
  text "29,46" at -44221.17,-30530.37 h3 r90
  text "11,5" at -44413.72,-30539.35 h3 r90
Mechanical 19:
  lines w0.5: -44367.22,-30388.1 -44338.27,-30388.1 ; -44353.35,-30401.08 -44353.35,-30374.83 ; -44297.22,-30388.1 -44268.27,-30388.1 ; -44283.35,-30401.08 -44283.35,-30374.83

## Dimensions
6614.17,9251.97 to 6088.7,8450.77 on Mechanical 1

## Text inside footprints (layer, text, board x,y; h text height)
SW1: Top Overlay "1" at 4366.41,5516.05 h35; Top Overlay "3" at 4359.41,5317.15 h35; Top Overlay "2" at 5067.41,5519.05 h35; Top Overlay "4" at 5066.41,5317.15 h35
SW2: Top Overlay "4" at 2310.5,5317.15 h35; Top Overlay "2" at 2311.5,5519.05 h35; Top Overlay "3" at 1603.5,5317.15 h35; Top Overlay "1" at 1610.5,5516.05 h35
SW3: Top Overlay "4" at 1798.69,3504.55 h35; Top Overlay "2" at 1799.69,3706.45 h35; Top Overlay "3" at 1091.69,3504.55 h35; Top Overlay "1" at 1098.69,3703.45 h35